# Altium PCB AIR_TEST.pcbdoc
Units mil, origin at the board's own origin, x right, y up, seen from the top; angles counter-clockwise.
Board outline 3796 x 4196 mil, 2 copper layers (Top Layer, Bottom Layer); 28 components, 48 nets, 198 pads, 12 vias.
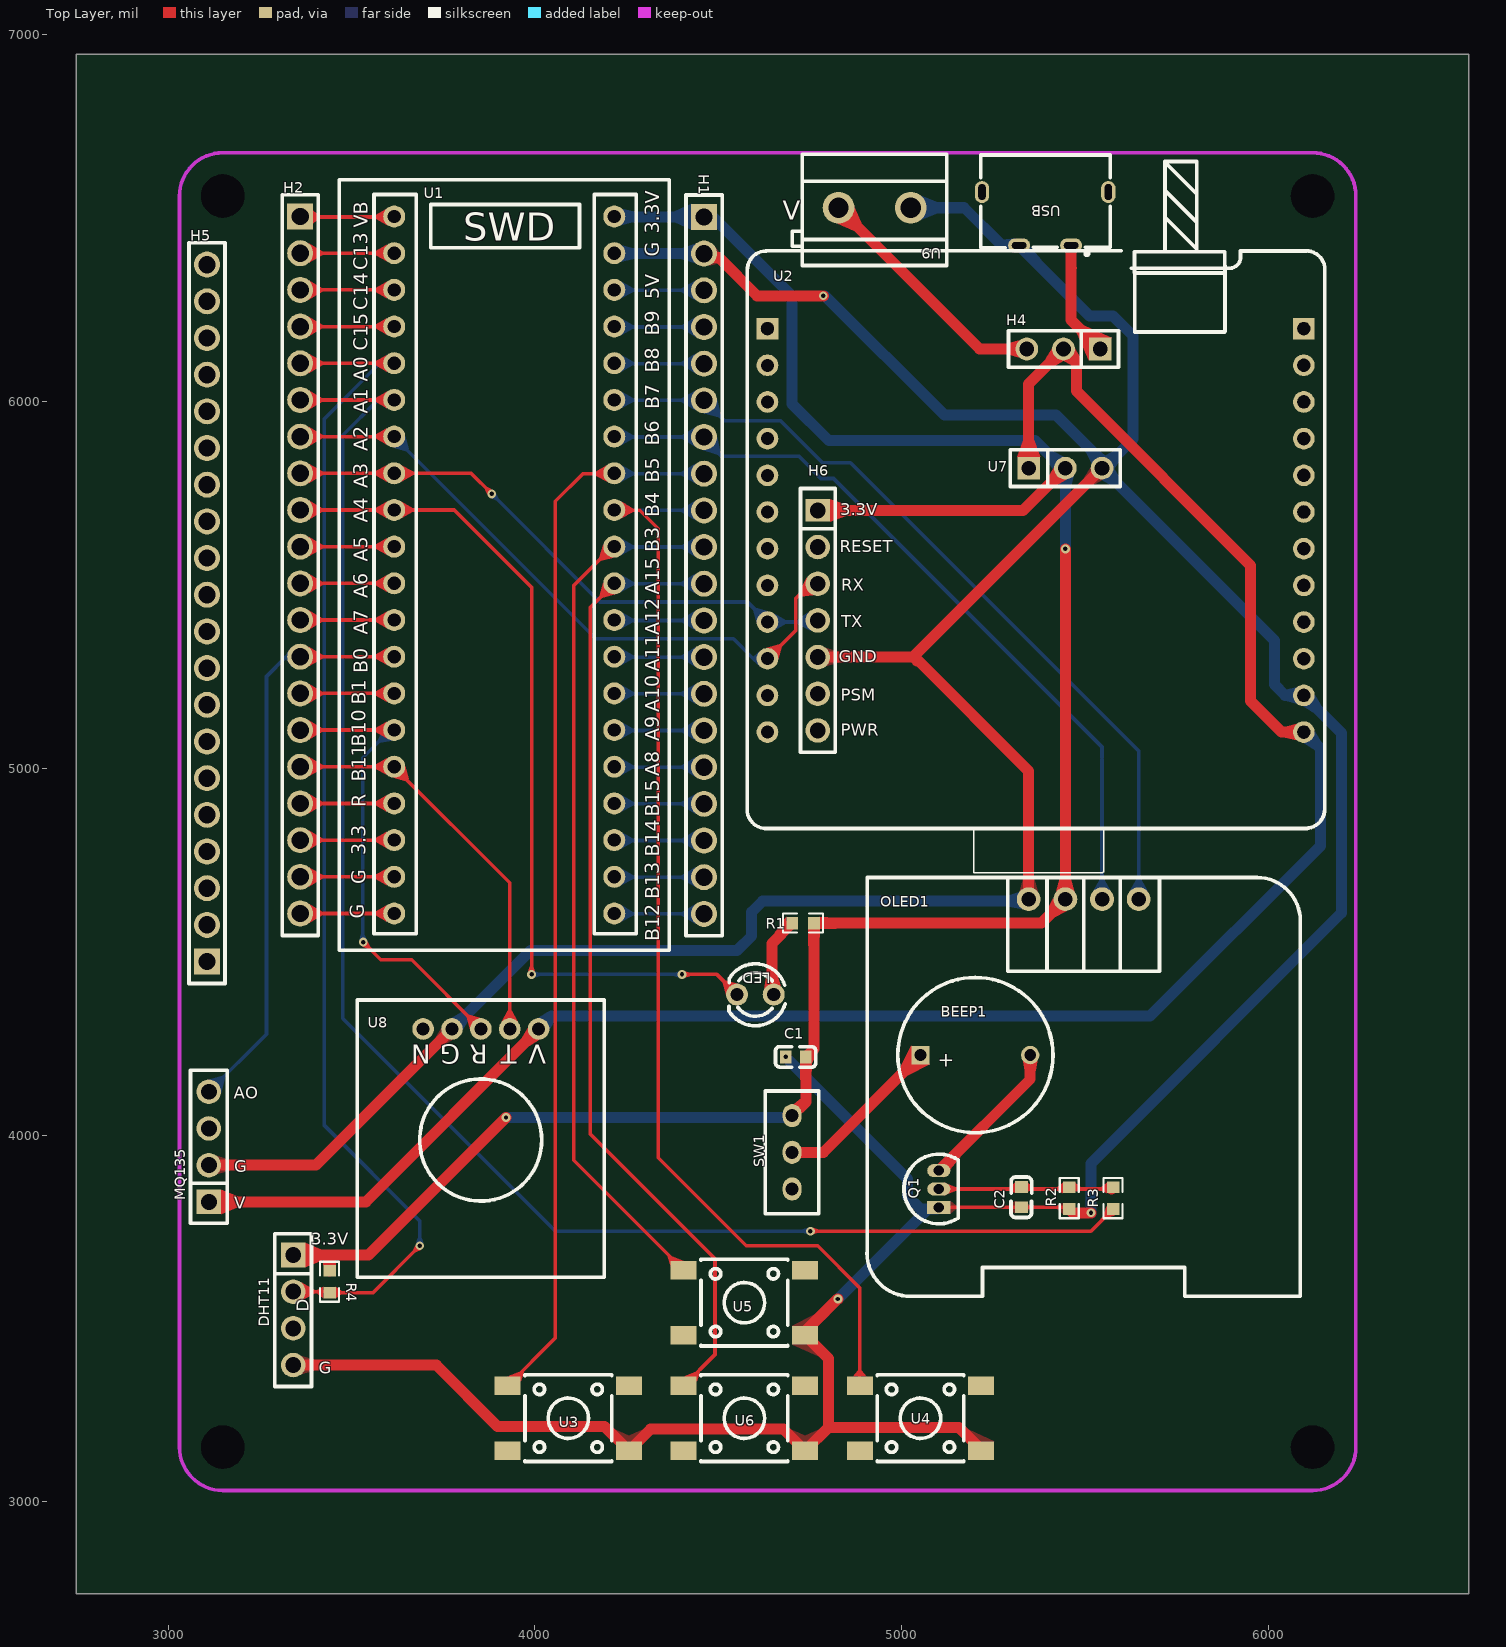
[diagram p0: Top Layer view]
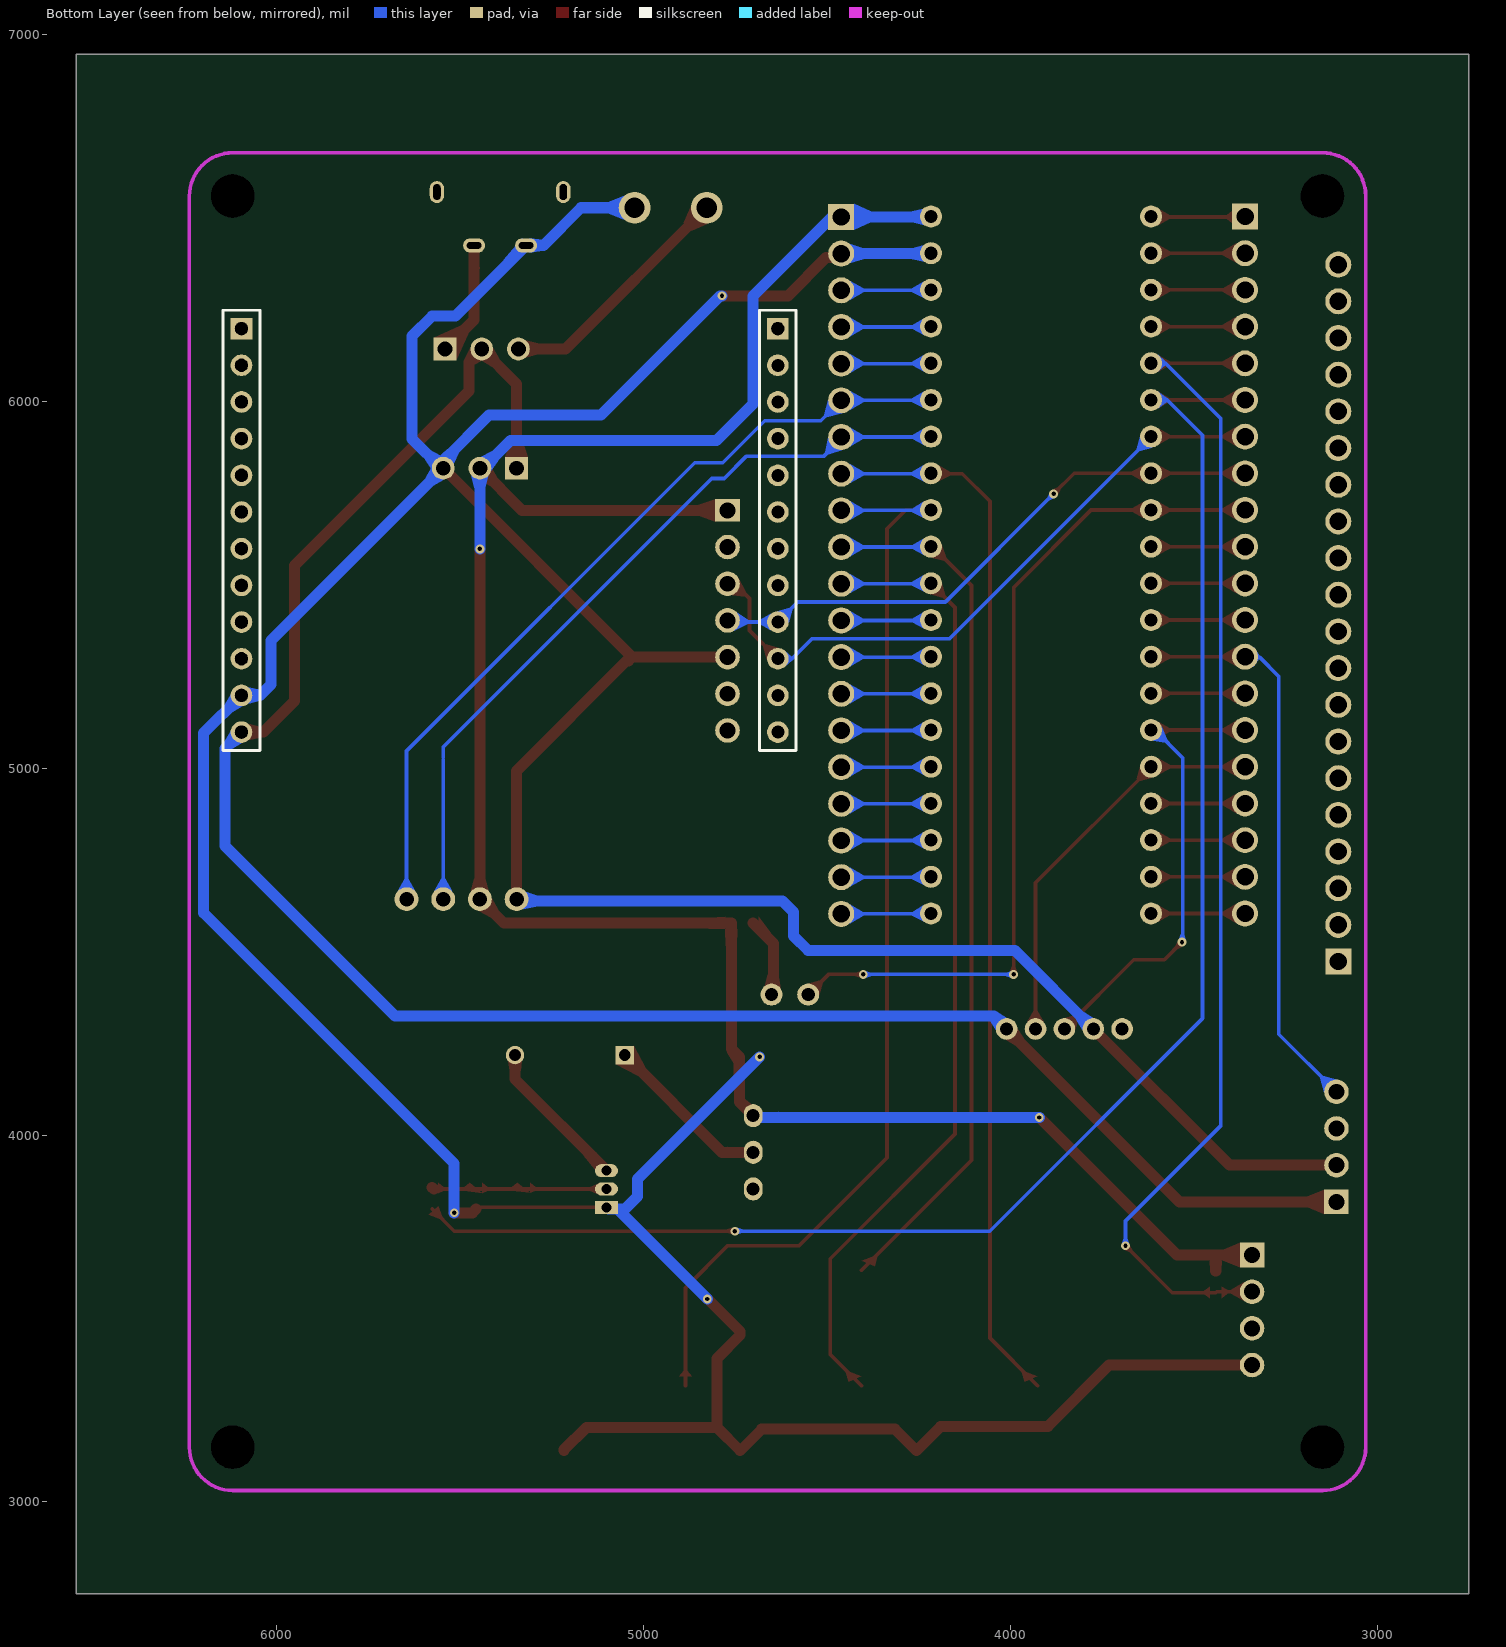
[diagram p1: Bottom Layer view, seen from below]

## Layer stack, top to bottom
Top Layer: signal copper (thickness not stored)
Dielectric: dielectric 12.6, FR-4, Dk 4.8
Bottom Layer: signal copper (thickness not stored)

## Board outline
6546,2750 2750,2750 2750,6946 6546,6946
cut-out: 3208.17,6559.89 ccw(c3149.11,6559.89) 3090.06,6559.89 ccw(c3149.11,6559.89)
cut-out: 3208.17,3149.1 ccw(c3149.11,3149.1) 3090.06,3149.1 ccw(c3149.11,3149.1)
cut-out: 6178.95,6559.89 ccw(c6119.9,6559.89) 6060.84,6559.89 ccw(c6119.9,6559.89)
cut-out: 6178.95,3149.1 ccw(c6119.9,3149.1) 6060.84,3149.1 ccw(c6119.9,3149.1)

## Components (designator, comment, footprint, x,y, rotation, side; value= is the part's Value field where it differs from the comment)
BEEP1 "BEEP" SOT12-7.6 5051,4218 r0 top
C1 "CAP_0603" C0603 4711,4213 r0 top
C2 "CAP_0603" C0603 5326,3830.8 r90 top
DHT11 "HDR-F_2.54_1x4P" HDR-TH_4P-P2.54-V-F 3341,3523 r270 top
H1 "HDR-F_2.54_1x20P" HDR-TH_20P-P2.54-V-F 4461,5553 r270 top
H2 "HDR-F_2.54_1x20P" HDR-TH_20P-P2.54-V-F 3360,5554 r270 top
H4 "HDR-F_2.54_1x3P" HDR-TH_3P-P2.54-V-F 5441,6143 r180 top
H5 "HDR-F_2.54_1x20P" HDR-TH_20P-P2.54-V-F 3106,5423 r90 top
H6 "HDR-F_2.54_1x7P" HDR-TH_7P-P2.54-V-F 4771,5403 r0 top
LED "LED_TH-R_3mm" LED_TH-3mm 4601,4383 r180 top
MQ135 "HDR-F_2.54_1x4P" HDR-TH_4P-P2.54-V-F 3111,3968 r90 top
OLED1 "0.96OLED模块_4P" 0.96OLED_4P 5496,4643 r0 top
Q1 "S8050_TO_NPN" S8050_TO_92 5101,3853 r90 top
R1 "Res_0603" R0603 4731,4578 r0 top
R2 "Res_0603" R0603 5456.48,3828 r90 top
R3 "Res_0603" R0603 5576,3828 r90 top
R4 "Res_0603" R0603 3440,3600 r270 top
SW1 "ss-12d00-g4拨动开关" 3脚拨动开关SS-12D00-G4 4701,3953 r90 top
U1 "STM32F103C8T6" STM32F103C8T6最小系统模块 3916.33,5554.15 r0 top
U2 "NB-CORE-V4.0(BC26)" NB-CORE-V4.0(BC26) 5386,5608 r0 top
U3 "四角按键" SW-SMD_4P-L6.0-W6.0-P4.50-LS9.2 4091,3228 r0 top
U4 "四角按键" SW-SMD_4P-L6.0-W6.0-P4.50-LS9.2 5051,3228 r0 top
U5 "四角按键" SW-SMD_4P-L6.0-W6.0-P4.50-LS9.2 4571,3543 r0 top
U6 "四角按键" SW-SMD_4P-L6.0-W6.0-P4.50-LS9.2 4571,3228 r0 top
U7 "AMS1117-3.3" HDR-TH_3P-P2.54-V-F 5446,5818 r0 top
U8 "ZE08B" ZE08B 3516,4368 r180 top
U9 "KF301-5.0-2P" CONN-TH_P5.00_KF301-5.0-2P 4926,6528 r180 top
USB "KH-TYPE-C-2P" USB-SMD_KH-TYPE-C-2P 5391,6498 r180 top

## Footprints (in the part's own frame and the unit in brackets; to place one, negate y for a bottom-side part, rotate by r counter-clockwise, add the part's x,y. Pads: shape width x height; smd on the part's side, far side on the other; paste and mask are expansions set on the pad)
0.96OLED_4P [mm]
  round 1.65 hole 1 copper offset 0,0 paste+0 mask+0.051: 1(-3.81,-0.002) 2(-1.27,0.001) 3(1.27,0.001) 4(3.81,0.001)
  silkscreen extent -15,-27.5 15,1.5
3脚拨动开关SS-12D00-G4 [mil]
  oval 63x51.2 hole 35.4 paste+4 mask+4: 1(-100,0) 2(0,0) 3(100,0)
  silkscreen extent -167,-73 167,73
C0603 [mm]
  rect 0.8x0.9 smd paste+0 mask+0.051: 1(-0.7,0) 2(0.7,0)
  silkscreen extent -1.41,-0.71 1.39,0.72
CONN-TH_P5.00_KF301-5.0-2P [mm]
  round 2.2 hole 1.4 paste+0 mask+0.051: 1(-2.5,0) 2(2.5,0)
  silkscreen extent -5,-3.7 5.71,4
HDR-TH_3P-P2.54-V-F [mil]
  rect 62x62 hole 40.16 paste+0 mask+2: 1(-100,0)
  round 62 hole 40.16 paste+0 mask+2: 2(0,0) 3(100,0)
  silkscreen extent -150,-50 150,50
HDR-TH_4P-P2.54-V-F [mm]
  rect 1.7x1.7 hole 1.1 paste+0 mask+0.051: 1(-3.81,0)
  round 1.7 hole 1.1 paste+0 mask+0.051: 2(-1.27,0) 3(1.27,0) 4(3.81,0)
  silkscreen extent -5.29,-1.27 5.29,1.27
HDR-TH_7P-P2.54-V-F [mm]
  rect 1.7x1.575 hole 1.1 paste+0 mask+0.051: 1(0,7.62)
  round 1.7 hole 1.1 paste+0 mask+0.051: 2(0,5.08) 3(0,2.54) 4(0,0) 5(0,-2.54) 6(0,-5.08) 7(0,-7.62)
  silkscreen extent -1.2,-9.13 1.2,9.13
HDR-TH_20P-P2.54-V-F [mm]
  rect 1.8x1.8 hole 1.2 paste+0 mask+0.051: 1(-24.13,0)
  round 1.8 hole 1.2 paste+0 mask+0.051: 2(-21.59,0) 3(-19.05,0) 4(-16.51,0) 5(-13.97,0) 6(-11.43,0) 7(-8.89,0) 8(-6.35,0) 9(-3.81,0) 10(-1.27,0) 11(1.27,0) 12(3.81,0) 13(6.35,0) 14(8.89,0) 15(11.43,0) 16(13.97,0) 17(16.51,0) 18(19.05,0) 19(21.59,0) 20(24.13,0)
  silkscreen extent -25.65,-1.25 25.65,1.25
LED_TH-3mm [mil]
  round 60 hole 36 paste+0 mask+2: 1(-50,0) 2(50,0)
  silkscreen extent -81,-84 72,85
NB-CORE-V4.0(BC26) [mm]
  rect 1.5x1.5 hole 0.899 slot 0.904 at 90 deg paste+0 mask+0.051: 1(-19.103,15.001)
  round 1.5 hole 0.9 paste+0 mask+0.051: 2(-19.103,12.461) 3(-19.103,9.921) 4(-19.103,7.381) 5(-19.103,4.841) 6(-19.103,2.301) 7(-19.103,-0.239) 8(-19.103,-2.779) 9(-19.103,-5.319) 10(-19.103,-7.859) 11(-19.103,-10.399) 12(-19.103,-12.939)
  rect 1.5x1.5 hole 0.9 slot 0.905 at 90 deg paste+0 mask+0.051: 13(18.034,15.001)
  round 1.5 hole 0.9 slot 0.905 at 90 deg paste+0 mask+0.051: 14(18.034,12.461) 15(18.034,9.921) 16(18.034,7.381) 17(18.034,4.841) 18(18.034,2.301) 19(18.034,-0.239) 20(18.034,-2.779) 21(18.034,-5.319) 22(18.034,-7.859) 23(18.034,-10.399) 24(18.034,-12.939)
  silkscreen extent -20.51,-22.69 19.49,26.59
R0603 [mil]
  rect 31.75x34.02 smd paste-3937.01 mask+2: 1(-29.66,0) 2(29.66,0)
  silkscreen extent -55,-26 55,26
S8050_TO_92 [mil]
  rect 35.4x63 hole 27.6 paste+0 mask+2: 1(-50,0)
  oval 35.4x63 hole 27.6 paste+0 mask+2: 2(0,0) 3(50,0)
  silkscreen extent -95,-53 95,95
SOT12-7.6 [mil]
  rect 50x50 hole 32 mask+2: 1(0,0)
  round 50 hole 32 mask+2: 2(299.21,0)
  silkscreen extent -62,-212 361,212
STM32F103C8T6最小系统模块 [mil]
  round 60 hole 36 paste+0 mask+4: 1(-300,950) 2(-300,850) 3(-300,750) 4(-300,650) 5(-300,550) 6(-300,450) 7(-300,350) 8(-300,250) 9(-300,150) 10(-300,50) 11(-300,-50) 12(-300,-150) 13(-300,-250) 14(-300,-350) 15(-300,-450) 16(-300,-550) 17(-300,-650) 18(-300,-750) 19(-300,-850) 20(-300,-950) 21(300,-950) 22(300,-850) 23(300,-750) 24(300,-650) 25(300,-550) 26(300,-450) 27(300,-350) 28(300,-250) 29(300,-150) 30(300,-50) 31(300,50) 32(300,150) 33(300,250) 34(300,350) 35(300,450) 36(300,550) 37(300,650) 38(300,750) 39(300,850) 40(300,950)
  silkscreen extent -450,-1050 450,1050
SW-SMD_4P-L6.0-W6.0-P4.50-LS9.2 [mm]
  rect 1.8x1.3 smd paste+0 mask+0.051: 1(-4.2,2.25) 2(4.2,2.25) 3(-4.2,-2.25) 4(4.2,-2.25)
  silkscreen extent -3,-3 3,3
USB-SMD_KH-TYPE-C-2P [mm]
  oval 1.524x1 hole 0.45 slot 1 at 0 deg paste+0 mask+0.05: 1(-1.8,1.85) 2(1.8,1.85)
  oval 1x1.524 hole 0.5 slot 1.1 at 90 deg paste+0 mask+0.05: 3(4.375,-1.85) 4(-4.375,-1.85)
  silkscreen extent -4.5,-4.41 4.46,2.53
ZE08B [mm]
  round 1.5 hole 0.9 mask+0.051: 1(-12.55,2) 2(-10.55,2) 3(-8.55,2) 4(-6.55,2) 5(-4.55,2)
  silkscreen extent -17.1,0 0,19.2

## Via types
v1: diameter 24, hole 12, Top Layer to Bottom Layer, 12 vias

## Nets (pads, with @x,y where several pads share a name; then routed paths per layer and width w, separated by ;. In a path a pad name is that pad's centre, name@x,y a point inside that pad or via, vN(x,y) a via of type N, cw(c..) or ccw(c..) an arc to the next point about the centre after c; other vN are vias at no path point)
3.3V: C1.2 DHT11.1 H1.1 H6.1 OLED1.2 R1.2 R4.1 SW1.3 U1.40 U7.2 | length 6408.8
  Top Layer w30: DHT11.1 3435.44,3673 ; R4.1 3440,3668.44 3435.44,3673 ; v1(3921,4048) 3546,3673 3435.44,3673 ; SW1.3 4738.56,4090.56 C1.2 4760.66,4235.1 R1.2 5380.95,4578 OLED1.2 v1(5446,5598) ; H6.1 5330.99,5702.99 U7.2
  Bottom Layer w30: v1(3921,4048) 4696,4048 SW1.3 ; U1.40@4216,6503 H1.1 4486,6503 4701,6288 4701,5993 4801,5893 5362.7,5893 5437.7,5818 U7.2 v1(5446,5598)
5V: H4.2 MQ135.1 U2.24 U7.1 U8.1 | length 5476.6
  Top Layer w30: MQ135.1 3538.83,3818 U8.1 ; U7.1 5346,6048 H4.2 5476,6108 5476,6028 5951,5553 5951,5183 6035.42,5098.58 U2.24
  Bottom Layer w30: U8.1 4044.83,4324 5677,4324 6141,4788 6141,5053.58 U2.24
5V_L: H4.3 U9.2 | length 672.9
  Top Layer w30: U9.2 5212.57,6143 H4.3
5V_T: H4.1 USB.1 | length 314.9
  Top Layer w30: USB.1 5461.87,6222.13 H4.1
$1N1192: H2.1 U1.1 | length 256.8
  Top Layer w10: H2.1@3360,6503 3615.18,6503 U1.1
$1N1194: H2.2 U1.2 | length 256.4
  Top Layer w10: H2.2 3616.18,6404 U1.2
$1N1196: H2.3 U1.3 | length 256.4
  Top Layer w10: H2.3 3360.15,6304.15 U1.3
$1N1198: H2.4 U1.4 | length 256.4
  Top Layer w10: H2.4 3616.18,6204 U1.4
$1N1210: H2.10 U1.10 | length 256.4
  Top Layer w10: H2.10 3616.18,5604 U1.10
$1N1212: H2.11 U1.11 | length 256.4
  Top Layer w10: H2.11 3616.18,5504 U1.11
$1N1214: H2.12 U1.12 | length 256.4
  Top Layer w10: H2.12 3616.18,5404 U1.12
$1N1218: H2.14 U1.14 | length 256.4
  Top Layer w10: H2.14 3360.15,5204.15 U1.14
$1N1224: H2.17 U1.17 | length 256.4
  Top Layer w10: H2.17 3616.18,4904 U1.17
$1N1226: H2.18 U1.18 | length 256.4
  Top Layer w10: H2.18 3616.18,4804 U1.18
$1N1228: H2.19 U1.19 | length 256.4
  Top Layer w10: H2.19 3360.15,4704.15 U1.19
$1N1230: H2.20 U1.20 | length 256.4
  Top Layer w10: H2.20 3616.18,4604 U1.20
$1N1236: H1.3 U1.38 | length 245
  Bottom Layer w10: U1.38@4216,6303 H1.3
$1N1238: H1.4 U1.37 | length 245
  Bottom Layer w10: U1.37@4216,6203 H1.4
$1N1240: H1.5 U1.36 | length 245
  Bottom Layer w10: U1.36@4216,6103 H1.5
$1N1254: H1.12 U1.29 | length 245
  Bottom Layer w10: U1.29@4216,5403 H1.12
$1N1256: H1.13 U1.28 | length 245
  Bottom Layer w10: U1.28@4216,5303 H1.13
$1N1258: H1.14 U1.27 | length 245
  Bottom Layer w10: U1.27@4216,5203 H1.14
$1N1260: H1.15 U1.26 | length 245
  Bottom Layer w10: U1.26@4216,5103 H1.15
$1N1262: H1.16 U1.25 | length 245
  Bottom Layer w10: U1.25@4216,5003 H1.16
$1N1264: H1.17 U1.24 | length 245
  Bottom Layer w10: U1.24@4216,4903 H1.17
$1N1266: H1.18 U1.23 | length 245
  Bottom Layer w10: U1.23@4216,4803 H1.18
$1N1268: H1.19 U1.22 | length 245
  Bottom Layer w10: U1.22@4216,4703 H1.19
$1N1270: H1.20 U1.21 | length 245
  Bottom Layer w10: U1.21@4216,4603 H1.20
$1N3735: LED.1 R1.1 | length 220
  Top Layer w30: LED.1 4646,4388 4646,4522.66 R1.1
$1N4212: BEEP1.2 Q1.3 | length 418.2
  Top Layer w30: Q1.3 5350.21,4152.21 BEEP1.2
$1N4307: C2.2 Q1.2 R2.2 R3.2 | length 476.9
  Top Layer w10: Q1.2 R3.2@5571.34,3853
  Top Layer w30: R3.2@5571.34,3853 R3.2
$1N4387: BEEP1.1 SW1.2 | length 459.8
  Top Layer w30: SW1.2 4786,3953 BEEP1.1
A0: DHT11.2 H2.5 R4.2 U1.5 | length 3271
  Top Layer w10: DHT11.2 3437.34,3573 R4.2 3558.34,3570.34 v1(3686,3698) ; H2.5 3616.18,6104 U1.5
  Bottom Layer w10: U1.5 3577.15,6104.15 3426,5953 3426,4026 3686,3766 v1(3686,3698)
A1: H2.6 R3.1 U1.6 | length 4391.7
  Top Layer w10: H2.6 3616.18,6004 U1.6 ; v1(4751,3738) 5515.66,3738 R3.1
  Bottom Layer w10: U1.6 3572.33,6004.15 3476,5907.82 3476,4318 4056,3738 v1(4751,3738)
A2: H2.7 H6.3 U1.7 U2.10 | length 1798.6
  Top Layer w10: H2.7 3616.18,5904 U1.7 ; U2.10 4711,5375.68 4711,5463 4750.99,5502.99 H6.3
  Bottom Layer w10: U1.7 3616.33,5902.67 4166,5353 4541,5353 4595.42,5298.58 U2.10
A3: H2.8 H6.4 U1.8 U2.9 | length 1580.9
  Top Layer w10: H2.8 3616.18,5804 U1.8 3825.85,5804.15 v1(3882,5748)
  Bottom Layer w10: v1(3882,5748) 4177,5453 4579.48,5453 U2.9 4766.59,5398.58 H6.4
A4: H2.9 LED.2 U1.9 | length 2356.3
  Top Layer w10: H2.9 3616.18,5704 U1.9 3616.48,5704 3780,5704 3991,5493 v1(3991,4438) ; v1(4401,4438) 4496,4438 LED.2
  Bottom Layer w10: v1(3991,4438) v1(4401,4438)
A15: H1.11 U1.30 U6.1 | length 2634.5
  Top Layer w10: U1.30@4216,5503 4151,5438 4151,4003 4491,3663 4491,3401.93 U6.1
  Bottom Layer w10: U1.30@4216,5503 H1.11
B0: H2.13 MQ135.4 U1.13 | length 1567.4
  Top Layer w10: H2.13 3616.18,5304 U1.13
  Bottom Layer w10: MQ135.4 3268,4275 3268,5250 3321,5303 H2.13@3360,5303
B3: H1.10 U1.31 U5.1 | length 2389
  Top Layer w10: U1.31@4216,5603 4211,5603 4106,5498 4106,3931.24 U5.1
  Bottom Layer w10: U1.31@4216,5603 H1.10
B4: H1.9 U1.32 U4.1 | length 3064
  Top Layer w10: U1.32@4216,5703 4286,5703 4336,5653 4336,3938 4576,3698 4771,3698 4885.65,3583.35 U4.1
  Bottom Layer w10: U1.32@4216,5703 H1.9
B5: H1.8 U1.33 U3.1 | length 2901.5
  Top Layer w10: U3.1 4055.62,3446.56 4055.62,5727.62 4131,5803 U1.33@4216,5803
  Bottom Layer w10: U1.33@4216,5803 H1.8
B6: H1.7 OLED1.3 U1.34 | length 2094
  Bottom Layer w10: U1.34@4216,5903 H1.7@4456,5903 ; H1.7 H1.7@4456,5903 ; OLED1.3 5546,5024 ; 5546,5030 5546,5058 4814,5790 4780,5790 4719,5851 4508,5851 H1.7@4456,5903
B7: H1.6 OLED1.4 U1.35 | length 2229.9
  Bottom Layer w10: U1.35@4216,6003 H1.6 4516.61,5947.39 4669.61,5947.39 4784,5833 4860,5833 5646,5047 OLED1.4
B10: H2.15 U1.15 U8.3 | length 1295.8
  Top Layer w10: H2.15 3360.15,5104.15 U1.15 ; v1(3532,4526) 3580,4478 3663.87,4478 U8.3
  Bottom Layer w10: v1(3532,4526) 3530.34,4527.66 3530.34,5028.81 3605.69,5104.15 U1.15
B11: H2.16 U1.16 U8.2 | length 1100.8
  Top Layer w10: H2.16 3360.15,5004.15 U1.16 ; U1.16@3616,5003 3931.35,4687.65 U8.2
GND: C1.1 C2.1 DHT11.4 H1.2 H6.5 MQ135.2 OLED1.1 Q1.1 R2.1 U1.39 U2.23 U3.4 U4.4 U5.4 U6.4 U7.3 U8.4 U9.1 USB.2 | length 13554.1
  Top Layer w10: Q1.1 R2.1@5451.82,3803
  Top Layer w30: MQ135.2 3402.61,3918 U8.4 ; DHT11.4 3731,3373 3897.99,3206.01 4189.76,3206.01 U3.4 4314.94,3198 4677.77,3198 U6.4 4799.94,3203 ; H1.2@4476,6392 4502,6392 4606,6288 v1(4786,6288) ; H6.5 5030.99,5302.99 ; v1(4826,3553) 4824.94,3553 4736.35,3464.41 U5.4 4799.94,3390.83 4799.94,3203 ; U4.4 5216.35,3142.65 5156,3203 4799.94,3203 ; OLED1.1@5346,4642.95 5346,4993 5046,5293 5040.99,5293 5030.99,5302.99 ; R2.1 5466.82,3788 v1(5516,3788) ; U7.3 5030.99,5302.99
  Bottom Layer w30: U8.4 3987.61,4503 4551,4503 4591,4543 4591,4608 4621,4638 5341.05,4638 OLED1.1@5346,4642.95 ; U1.39@4216,6403 H1.2 ; v1(4683.44,4213) 5016,3880.44 5016,3833 5051,3798 Q1.1@5071,3798 ; v1(4786,6288) 4791,6288 5116,5963 5421,5963 5546,5838 U7.3 U7.3@5548.5,5815.5 ; v1(4826,3553) Q1.1@5071,3798 ; U9.1 5170.33,6528 5273.17,6425.16 USB.2 5512.3,6233 5576,6233 5631,6178 5631,5898 U7.3@5548.5,5815.5 ; Q1.1 5096,3798 Q1.1@5071,3798 ; v1(5516,3788) 5516,3923 6199,4606 6199,5095.58 U2.23 6045.42,5198.58 6016,5228 6016,5348 U7.3@5548.5,5815.5 ; U7.3@5546,5813 U7.3@5548.5,5815.5
"": DHT11.3 H5.1 H5.2 H5.3 H5.4 H5.5 H5.6 H5.7 H5.8 H5.9 H5.10 H5.11 H5.12 H5.13 H5.14 H5.15 H5.16 H5.17 H5.18 H5.19 H5.20 H6.2 H6.6 H6.7 MQ135.3 SW1.1 U2.1 U2.2 U2.3 U2.4 U2.5 U2.6 U2.7 U2.8 U2.11 U2.12 U2.13 U2.14 U2.15 U2.16 U2.17 U2.18 U2.19 U2.20 U2.21 U2.22 U3.2 U3.3 U4.2 U4.3 U5.2 U5.3 U6.2 U6.3 U8.5 USB.3 USB.4

## Polygon pours and split planes (outlines as drawn)
GND on Top Layer (solid, remove dead copper, pour order 0): 3000,3000 6296,3000 6296,6696 3000,6696

## Keep-outs
Board Outline Layer:
  lines w10 net "": 3031,3149.1 ccw(c3149.11,3149.1) 3149.11,3030.99 6119.9,3030.99 ccw(c6119.9,3149.1) 6238.01,3149.1 6238.01,6559.89 ccw(c6119.9,6559.89) 6119.9,6678 3149.11,6678 ccw(c3149.11,6559.89) 3031,6559.89 3031,3149.1

## Other copper
Top Layer:
  region net $1N1192: 3410.43,6508 3395.43,6520.5 3395.43,6485.5 3410.43,6498
  region net $1N1194: 3383.44,6377.43 3420.24,6399 3420.24,6409 3383.44,6430.57
  region net $1N1196: 3383.55,6277.52 3420.26,6299.15 3420.21,6309.15 3383.32,6330.67
  region net $1N1198: 3383.44,6177.43 3420.24,6199 3420.24,6209 3383.44,6230.57
  region net A0: 3383.44,6077.43 3420.24,6099 3420.24,6109 3383.44,6130.57
  region net A1: 3383.44,5977.43 3420.24,5999 3420.24,6009 3383.44,6030.57
  region net A2: 3383.44,5877.43 3420.24,5899 3420.24,5909 3383.44,5930.57
  region net A3: 3383.44,5777.43 3420.24,5799 3420.24,5809 3383.44,5830.57
  region net A4: 3383.44,5677.43 3420.24,5699 3420.24,5709 3383.44,5730.57
  region net $1N1210: 3383.44,5577.43 3420.24,5599 3420.24,5609 3383.44,5630.57
  region net $1N1212: 3383.44,5477.43 3420.24,5499 3420.24,5509 3383.44,5530.57
  region net $1N1214: 3383.44,5377.43 3420.24,5399 3420.24,5409 3383.44,5430.57
  region net B0: 3383.44,5277.43 3420.24,5299 3420.24,5309 3383.44,5330.57
  region net $1N1218: 3383.55,5177.52 3420.26,5199.15 3420.21,5209.15 3383.32,5230.67
  region net B10: 3383.55,5077.52 3420.26,5099.15 3420.21,5109.15 3383.32,5130.67
  region net B11: 3383.55,4977.52 3420.26,4999.15 3420.21,5009.15 3383.32,5030.67
  region net $1N1224: 3383.44,4877.43 3420.24,4899 3420.24,4909 3383.44,4930.57
  region net $1N1226: 3383.44,4777.43 3420.24,4799 3420.24,4809 3383.44,4830.57
  region net $1N1228: 3383.55,4677.52 3420.26,4699.15 3420.21,4709.15 3383.32,4730.67
  region net $1N1230: 3383.44,4577.43 3420.24,4599 3420.24,4609 3383.44,4630.57
  region net 5V: 6076.47,5120.73 6045.8,5113.58 6045.8,5083.58 6076.47,5076.43
  region net A2: 4663.37,5296.73 4672.93,5330.54 4665.86,5337.61 4632.05,5328.05
  region net 5V_T: 5476.87,6361.05 5472.18,6405.48 5451.55,6405.48 5446.87,6361.05
  region net 3.3V: 5415.06,5819.94 5398.13,5791.34 5419.34,5770.13 5447.94,5787.06
  region net 5V: 5361,5894 5331,5894 5315,5849 5377,5849
  region net 5V_L: 5320.5,6166.25 5288.3,6158 5288.3,6128 5320.5,6119.75
  region net 5V: 5410.06,6144.94 5393.13,6116.34 5414.34,6095.13 5442.94,6112.06
  region net 5V: 5439.06,6112.06 5465.39,6097.39 5486.61,6118.61 5471.94,6144.94
  region net 5V_T: 5499.39,6205.82 5478.18,6184.61 5510,6112 5572,6174
  region net 3.3V: 3419.46,3658 3419.46,3688 3374.46,3706.46 3374.46,3639.54
  region net A0: 3363.13,3547.9 3397.89,3568 3397.89,3578 3363.13,3598.1
  region net 5V: 3189.46,3833 3144.46,3851.46 3144.46,3784.54 3189.46,3803
  region net B5: 3954.78,3352.78 3926.49,3342.18 3961.08,3327.27 3968.92,3352.78
  region net B4: 4880.65,3357.18 4868.15,3342.18 4903.15,3342.18 4890.65,3357.18
  region net B3: 4362.38,3667.78 4370.22,3642.27 4404.81,3657.18 4376.52,3667.78
  region net A15: 4448.92,3352.78 4434.78,3352.78 4406.49,3342.18 4441.08,3327.27
  region net 3.3V: 4775.66,4515.99 4776.54,4560.99 4744.78,4560.99 4745.66,4515.99
  region net 3.3V: 4821.54,4593 4776.54,4595.01 4776.54,4560.99 4821.54,4563
  region net $1N3735: 4653.64,4551.52 4673.73,4529.17 4685.46,4560.99 4685.46,4595.01
  region net $1N3735: 4669.88,4406.32 4661,4436.41 4631,4431.34 4625.51,4398.82
  region net A4: 4552.88,4412.94 4518.47,4422.6 4511.4,4415.53 4521.06,4381.12
  region net $1N4387: 4994.18,4182.39 5015.39,4161.18 5076,4193 5026,4243
  region net $1N4212: 5331.46,4201.46 5335.21,4175.5 5365.21,4175.5 5368.96,4201.46
  region net 3.3V: 4753.56,4150.28 4754.31,4195.28 4722.81,4195.28 4723.56,4150.28
  region net 3.3V: 4771.27,4224.49 4750.05,4245.71 4754.31,4230.72 4754.31,4195.28
  region net $1N4307: 5146.78,3858 5117.45,3870.5 5117.45,3835.5 5146.78,3848
  region net $1N4212: 5162.28,3943.07 5129.31,3952.52 5114.8,3920.7 5114.8,3885.3
  region net $1N4307: 5293.28,3858 5293.28,3848 5308.28,3842.62 5308.28,3870.5
  region net $1N4307: 5358.72,3858 5343.72,3870.5 5308.28,3842.62 5358.72,3848
  region net $1N4307: 5424.47,3858 5424.47,3848 5439.47,3841.78 5439.47,3870.5
  region net $1N4307: 5488.49,3858 5473.49,3870.5 5439.47,3841.78 5488.49,3848
  region net $1N4307: 5543.99,3858 5543.99,3848 5558.99,3841.78 5558.99,3870.5
  region net A1: 5556.59,3771.86 5584.87,3782.46 5558.99,3806.08 5548.39,3777.8
  region net 3.3V: 4749.17,4079.95 4727.95,4101.17 4675.4,4058.9 4726.6,4058.9
  region net $1N4387: 4769.93,3968 4726.6,3958.9 4726.6,3947.1 4769.93,3938
  region net 3.3V: 5413.58,4645.08 5396.35,4614.61 5417.56,4593.4 5448.03,4610.63
  region net 3.3V: 5470.36,4664.53 5461,4698.27 5431,4698.27 5421.64,4664.53
  region net 5V_L: 4824.86,6484.78 4869.02,6465.34 4890.24,6486.55 4870.79,6530.72
  region net A2: 4741.62,5519.02 4719.39,5478.46 4723.16,5468.09 4758.78,5471.84
  region net 3.3V: 4849.47,5717.99 4804.47,5733.99 4804.47,5671.99 4849.47,5687.99
  region net 5V: 3980.62,4291.11 3963.99,4264.37 3985.21,4243.16 4011.94,4259.79
  region net B11: 3953.5,4308.79 3936.35,4339.46 3926.35,4339.46 3909.21,4308.79
  region net B10: 3854.46,4318.73 3820.66,4328.29 3813.58,4321.22 3823.14,4287.41
  region net B5: 4195.64,5825.87 4165.14,5808 4165.53,5798 4197.36,5780.91
  region net B4: 4235.29,5680.91 4267.13,5698 4267.51,5708 4237.02,5725.87
  region net B3: 4186.72,5608.97 4175.02,5574.09 4181.39,5566.32 4215.25,5574.17
  region net A15: 4186.36,5505.45 4177.07,5471.15 4184.28,5464.21 4218.79,5474.25
  region net $1N1230: 3596.37,4626.55 3565.3,4609 3565.35,4599 3596.6,4581.55
  region net $1N1228: 3596.49,4726.65 3565.33,4709.15 3565.33,4699.15 3596.49,4681.65
  region net $1N1226: 3596.37,4826.55 3565.3,4809 3565.35,4799 3596.6,4781.55
  region net $1N1224: 3596.37,4926.55 3565.3,4909 3565.35,4899 3596.6,4881.55
  region net B11: 3613.41,4974.29 3647.99,4963.94 3655.31,4970.76 3646.32,5004.98
  region net B11: 3596.49,5026.65 3565.33,5009.15 3565.33,4999.15 3596.49,4981.65
  region net B10: 3596.49,5126.65 3565.33,5109.15 3565.33,5099.15 3596.49,5081.65
  region net $1N1218: 3596.49,5226.65 3565.33,5209.15 3565.33,5199.15 3596.49,5181.65
  region net B0: 3596.37,5326.55 3565.3,5309 3565.35,5299 3596.6,5281.55
  region net $1N1214: 3596.37,5426.55 3565.3,5409 3565.35,5399 3596.6,5381.55
  region net $1N1212: 3596.37,5526.55 3565.3,5509 3565.35,5499 3596.6,5481.55
  region net $1N1210: 3596.37,5626.55 3565.3,5609 3565.35,5599 3596.6,5581.55
  region net A4: 3596.37,5726.55 3565.3,5709 3565.35,5699 3596.6,5681.55
  region net A4: 3636.06,5681.55 3667.3,5699 3667.35,5709 3636.28,5726.55
  region net A3: 3596.37,5826.55 3565.3,5809 3565.35,5799 3596.6,5781.55
  region net A3: 3636.17,5781.65 3667.33,5799.15 3667.33,5809.15 3636.17,5826.65
  region net A2: 3596.37,5926.55 3565.3,5909 3565.35,5899 3596.6,5881.55
  region net A1: 3596.37,6026.55 3565.3,6009 3565.35,5999 3596.6,5981.55
  region net A0: 3596.37,6126.55 3565.3,6109 3565.35,6099 3596.6,6081.55
  region net $1N1198: 3596.37,6226.55 3565.3,6209 3565.35,6199 3596.6,6181.55
  region net $1N1196: 3596.49,6326.65 3565.33,6309.15 3565.33,6299.15 3596.49,6281.65
  region net $1N1194: 3596.37,6426.55 3565.3,6409 3565.35,6399 3596.6,6381.55
  region net $1N1192: 3595.64,6525.87 3565.14,6508 3565.53,6498 3597.36,6480.91
  region net A0: 3472.01,3575.34 3457.01,3586.22 3457.01,3554.46 3472.01,3565.34
  region net A0: 3407.99,3578 3407.99,3568 3422.99,3555.5 3422.99,3586.22
  region net 3.3V: 3425,3668.44 3422.99,3645.54 3457.01,3645.54 3455,3668.44
  region net A4: 4408.94,4429 4421.4,4433 4421.4,4443 4408.94,4447
  region net A4: 4000,4445.94 3996,4458.4 3986,4458.4 3982,4445.94
  region net A3: 3882.75,5759.98 3871.11,5765.96 3864.04,5758.89 3870.02,5747.25
  region net A1: 4758.94,3729 4771.4,3733 4771.4,3743 4758.94,3747
  region net B10: 3531.25,4514.02 3542.89,4508.04 3549.96,4515.11 3543.98,4526.75
  region net A0: 3674.02,3698.75 3668.04,3687.11 3675.11,3680.04 3686.75,3686.02
Bottom Layer:
  region net 3.3V: 4380.57,6488 4425.57,6467.57 4425.57,6538.43 4380.57,6518
  region net GND: 4437.56,6429.57 4400.76,6418 4400.76,6388 4437.56,6376.43
  region net $1N1236: 4437.56,6329.57 4400.76,6308 4400.76,6298 4437.56,6276.43
  region net $1N1238: 4437.56,6229.57 4400.76,6208 4400.76,6198 4437.56,6176.43
  region net $1N1240: 4437.56,6129.57 4400.76,6108 4400.76,6098 4437.56,6076.43
  region net B7: 4458.78,5967.64 4500.06,5956.87 4507.13,5963.94 4496.36,6005.22
  region net B7: 4437.56,6029.57 4400.76,6008 4400.76,5998 4437.56,5976.43
  region net B6: 4437.56,5929.57 4400.76,5908 4400.76,5898 4437.56,5876.43
  region net B6: 4455.26,5868.03 4497.17,5854.76 4504.95,5861.12 4496.41,5901.68
  region net B5: 4437.56,5829.57 4400.76,5808 4400.76,5798 4437.56,5776.43
  region net B4: 4437.56,5729.57 4400.76,5708 4400.76,5698 4437.56,5676.43
  region net B3: 4437.56,5629.57 4400.76,5608 4400.76,5598 4437.56,5576.43
  region net A15: 4437.56,5529.57 4400.76,5508 4400.76,5498 4437.56,5476.43
  region net $1N1254: 4437.56,5429.57 4400.76,5408 4400.76,5398 4437.56,5376.43
  region net $1N1256: 4437.56,5329.57 4400.76,5308 4400.76,5298 4437.56,5276.43
  region net $1N1258: 4437.56,5229.57 4400.76,5208 4400.76,5198 4437.56,5176.43
  region net $1N1260: 4437.56,5129.57 4400.76,5108 4400.76,5098 4437.56,5076.43
  region net $1N1262: 4437.56,5029.57 4400.76,5008 4400.76,4998 4437.56,4976.43
  region net $1N1264: 4437.56,4929.57 4400.76,4908 4400.76,4898 4437.56,4876.43
  region net $1N1266: 4437.56,4829.57 4400.76,4808 4400.76,4798 4437.56,4776.43
  region net $1N1268: 4437.56,4729.57 4400.76,4708 4400.76,4698 4437.56,4676.43
  region net $1N1270: 4437.56,4629.57 4400.76,4608 4400.76,4598 4437.56,4576.43
  region net B0: 3335.82,5329.9 3321,5308 3321,5298 3337.32,5276.77
  region net GND: 6076.47,5220.73 6045.8,5213.58 6045.8,5183.58 6076.47,5176.43
  region net GND: 6094.15,5169.11 6120.89,5152.48 6142.1,5173.69 6125.47,5200.43
  region net 5V: 6094.15,5069.11 6120.89,5052.48 6142.1,5073.69 6125.47,5100.43
  region net A3: 4653.43,5376.43 4684.1,5393.58 4684.1,5403.58 4653.43,5420.73
  region net A3: 4635.75,5428.05 4601.94,5437.61 4594.87,5430.54 4604.43,5396.73
  region net A2: 4614.37,5320.73 4595.42,5303.58 4595.42,5293.58 4614.37,5276.43
  region net GND: 5350.43,6373.66 5380.53,6385.99 5330.45,6444.85 5330.45,6405.48
  region net GND: 5273.17,6440.16 5273.17,6410.16 5309.82,6405.48 5309.82,6444.85
  region net GND: 5561.84,5844.65 5535.29,5869.92 5503.21,5859.58 5517.58,5830.39
  region net GND: 5576.52,5812.54 5595.11,5840.9 5576.33,5864.55 5547.6,5848.96
  region net GND: 5544.06,5787.06 5572.66,5770.13 5593.87,5791.34 5576.94,5819.94
  region net 3.3V: 5422.75,5797.5 5431,5765.3 5461,5765.3 5469.25,5797.5
  region net 3.3V: 5442.05,5848.75 5413.26,5863.65 5396.14,5838.35 5415.99,5810.24
  region net B0: 3144.4,4115.9 3154.76,4154.69 3147.69,4161.76 3108.9,4151.4
  region net 3.3V: 4630.73,4063 4634.63,4033 4675.4,4047.1 4675.4,4058.9
  region net B7: 5670.36,4664.53 5651,4698.27 5641,4698.27 5621.64,4664.53
  region net B6: 5570.36,4664.53 5551,4698.27 5541,4698.27 5521.64,4664.53
  region net GND: 5321.05,4663.75 5288.58,4653 5293.21,4623 5328.48,4615.6
  region net GND: 5053.07,6495.52 5098.04,6513 5098.04,6543 5053.07,6560.48
  region net A3: 4745.75,5424.95 4713.54,5403.58 4714.87,5393.58 4752.38,5375.2
  region net 5V: 4039.56,4287.41 4055.44,4313.39 4034.23,4334.61 4008.25,4318.73
  region net GND: 3803.34,4287.41 3819.97,4314.15 3798.76,4335.36 3772.02,4318.73
  region net 3.3V: 4235.29,6480.91 4266.75,6488 4267.9,6518 4237.02,6525.87
  region net GND: 4235.29,6380.91 4266.75,6388 4267.9,6418 4237.02,6425.87
  region net $1N1236: 4235.29,6280.91 4267.13,6298 4267.51,6308 4237.02,6325.87
  region net $1N1238: 4235.29,6180.91 4267.13,6198 4267.51,6208 4237.02,6225.87
  region net $1N1240: 4235.29,6080.91 4267.13,6098 4267.51,6108 4237.02,6125.87
  region net B7: 4235.29,5980.91 4267.13,5998 4267.51,6008 4237.02,6025.87
  region net B6: 4235.29,5880.91 4267.13,5898 4267.51,5908 4237.02,5925.87
  region net B5: 4235.29,5780.91 4267.13,5798 4267.51,5808 4237.02,5825.87
  region net B4: 4235.29,5680.91 4267.13,5698 4267.51,5708 4237.02,5725.87
  region net B3: 4235.29,5580.91 4267.13,5598 4267.51,5608 4237.02,5625.87
  region net A15: 4235.29,5480.91 4267.13,5498 4267.51,5508 4237.02,5525.87
  region net $1N1254: 4235.29,5380.91 4267.13,5398 4267.51,5408 4237.02,5425.87
  region net $1N1256: 4235.29,5280.91 4267.13,5298 4267.51,5308 4237.02,5325.87
  region net $1N1258: 4235.29,5180.91 4267.13,5198 4267.51,5208 4237.02,5225.87
  region net $1N1260: 4235.29,5080.91 4267.13,5098 4267.51,5108 4237.02,5125.87
  region net $1N1262: 4235.29,4980.91 4267.13,4998 4267.51,5008 4237.02,5025.87
  region net $1N1264: 4235.29,4880.91 4267.13,4898 4267.51,4908 4237.02,4925.87
  region net $1N1266: 4235.29,4780.91 4267.13,4798 4267.51,4808 4237.02,4825.87
  region net $1N1268: 4235.29,4680.91 4267.13,4698 4267.51,4708 4237.02,4725.87
  region net $1N1270: 4235.29,4580.91 4267.13,4598 4267.51,4608 4237.02,4625.87
  region net B10: 3587.82,5113.48 3572.51,5078.05 3577.75,5069.14 3610.64,5074.69
  region net A2: 3613.41,5874.29 3647.99,5863.94 3655.31,5870.76 3646.32,5904.98
  region net A1: 3596.49,6026.65 3572.33,6009.15 3572.33,5999.15 3596.49,5981.65
  region net A0: 3596.49,6126.65 3577.15,6109.15 3577.15,6099.15 3596.49,6081.65
  region net A4: 4393.06,4447 4380.6,4443 4380.6,4433 4393.06,4429
  region net A4: 3998.94,4429 4011.4,4433 4011.4,4443 3998.94,4447
  region net A3: 3881.25,5736.02 3892.89,5730.04 3899.96,5737.11 3893.98,5748.75
  region net A1: 4743.06,3747 4730.6,3743 4730.6,3733 4743.06,3729
  region net B10: 3539.82,4535.11 3535.34,4547.06 3525.34,4545.67 3521.99,4532.62
  region net A0: 3695,3705.94 3691,3718.4 3681,3718.4 3677,3705.94

## Silkscreen, mask and mechanical layers (free items; w line width, h text height)
Top Silkscreen Layer:
  text "V" at 4676,6495.29 h51.47
  text "AO" at 3179.01,4099.1 h32.45
  text "G" at 3180.35,3898.98 h32.69
  text "V" at 3180.35,3798.98 h32.69
  text "3.3V" at 3389.8,3701.1 h32.45
  text "D" at 3383.02,3518 h32.69 r90
  text "G" at 3410.35,3348.98 h32.69
Mechanical Layer:
  circle w1 net "": c3149.11,6559.89 r59.06
  circle w1 net "": c3149.11,3149.1 r59.06
  circle w1 net "": c6119.9,6559.89 r59.06
  circle w1 net "": c6119.9,3149.1 r59.06

## Text inside footprints (layer, text, board x,y; h text height)
BEEP1: Top Silkscreen Layer "+" at 5098.24,4186.5 h40
H6: Top Silkscreen Layer "3.3V" at 4831.8,5689.1 h32.45; Top Silkscreen Layer "RESET" at 4830.38,5589.1 h32.45; Top Silkscreen Layer "RX" at 4834.65,5484.1 h32.45; Top Silkscreen Layer "TX" at 4834.65,5384.1 h32.45; Top Silkscreen Layer "GND" at 4828.23,5289.1 h32.45; Top Silkscreen Layer "PSM" at 4833.23,5184.1 h32.45; Top Silkscreen Layer "PWR" at 4833.23,5089.1 h32.45
U1: Top Silkscreen Layer "SWD" at 3804.28,6438.47 h76.56; Top Silkscreen Layer "G" at 3534.01,4589.15 h37.97 r90; Top Silkscreen Layer "3.3" at 3539.17,4763.13 h38.28 r90; Top Silkscreen Layer "R" at 3539.01,4894.15 h37.97 r90; Top Silkscreen Layer "B11" at 3539.17,4963.13 h38.28 r90; Top Silkscreen Layer "B10" at 3539.17,5058.13 h38.28 r90; Top Silkscreen Layer "B1" at 3539.17,5173.59 h38.28 r90; Top Silkscreen Layer "B0" at 3544.17,5258.59 h38.28 r90; Top Silkscreen Layer "A7" at 3544.17,5363.59 h38.28 r90; Top Silkscreen Layer "A6" at 3544.17,5463.59 h38.28 r90; Top Silkscreen Layer "A5" at 3544.17,5563.59 h38.28 r90; Top Silkscreen Layer "A4" at 3544.17,5668.59 h38.28 r90; Top Silkscreen Layer "A3" at 3544.17,5763.59 h38.28 r90; Top Silkscreen Layer "A2" at 3544.17,5863.59 h38.28 r90; Top Silkscreen Layer "A1" at 3544.17,5966.22 h38.28 r90; Top Silkscreen Layer "A0" at 3544.17,6053.59 h38.28 r90; Top Silkscreen Layer "C15" at 3544.17,6138.13 h38.28 r90; Top Silkscreen Layer "C14" at 3544.17,6248.13 h38.28 r90; Top Silkscreen Layer "C13" at 3544.17,6358.13 h38.28 r90; Top Silkscreen Layer "VB" at 3544.17,6473.59 h38.28 r90; Top Silkscreen Layer "B12" at 4339.17,4528.13 h38.28 r90; Top Silkscreen Layer "B13" at 4339.17,4643.13 h38.28 r90; Top Silkscreen Layer "B14" at 4339.17,4758.13 h38.28 r90; Top Silkscreen Layer "B15" at 4339.17,4868.13 h38.28 r90; Top Silkscreen Layer "A8" at 4339.17,4978.59 h38.28 r90; Top Silkscreen Layer "A9" at 4339.17,5073.59 h38.28 r90; Top Silkscreen Layer "A10" at 4339.17,5153.13 h38.28 r90; Top Silkscreen Layer "A11" at 4339.17,5263.13 h38.28 r90; Top Silkscreen Layer "A12" at 4339.17,5363.13 h38.28 r90; Top Silkscreen Layer "A15" at 4339.17,5473.13 h38.28 r90; Top Silkscreen Layer "B3" at 4339.17,5588.59 h38.28 r90; Top Silkscreen Layer "B4" at 4339.17,5683.59 h38.28 r90; Top Silkscreen Layer "B5" at 4339.17,5778.59 h38.28 r90; Top Silkscreen Layer "B6" at 4339.17,5878.59 h38.28 r90; Top Silkscreen Layer "B7" at 4339.17,5978.59 h38.28 r90; Top Silkscreen Layer "B8" at 4339.17,6078.59 h38.28 r90; Top Silkscreen Layer "B9" at 4339.17,6178.59 h38.28 r90; Top Silkscreen Layer "5V" at 4339.17,6278.59 h38.28 r90; Top Silkscreen Layer "G" at 4339.01,6394.15 h37.97 r90; Top Silkscreen Layer "3.3V" at 4339.17,6457.67 h38.28 r90; Top Silkscreen Layer "G" at 3539.01,4684.15 h37.97 r90
U8: Top Silkscreen Layer "V" at 4031,4245.71 h51.47 r180; Top Silkscreen Layer "T" at 3951,4245.71 h51.47 r180; Top Silkscreen Layer "R" at 3871,4245.71 h51.47 r180; Top Silkscreen Layer "G" at 3796,4245.71 h51.47 r180; Top Silkscreen Layer "N" at 3716,4245.71 h51.47 r180